# Altium PCB Sanity0.PcbDoc
Units mm, origin at the board's own origin, x right, y up, seen from the top; angles counter-clockwise.
Board outline 116.27 x 115.86 mm, 2 copper layers (Top Layer, Bottom Layer), stack 0.325 mm thick; 84 components, 58 nets, 336 pads, 100 vias.
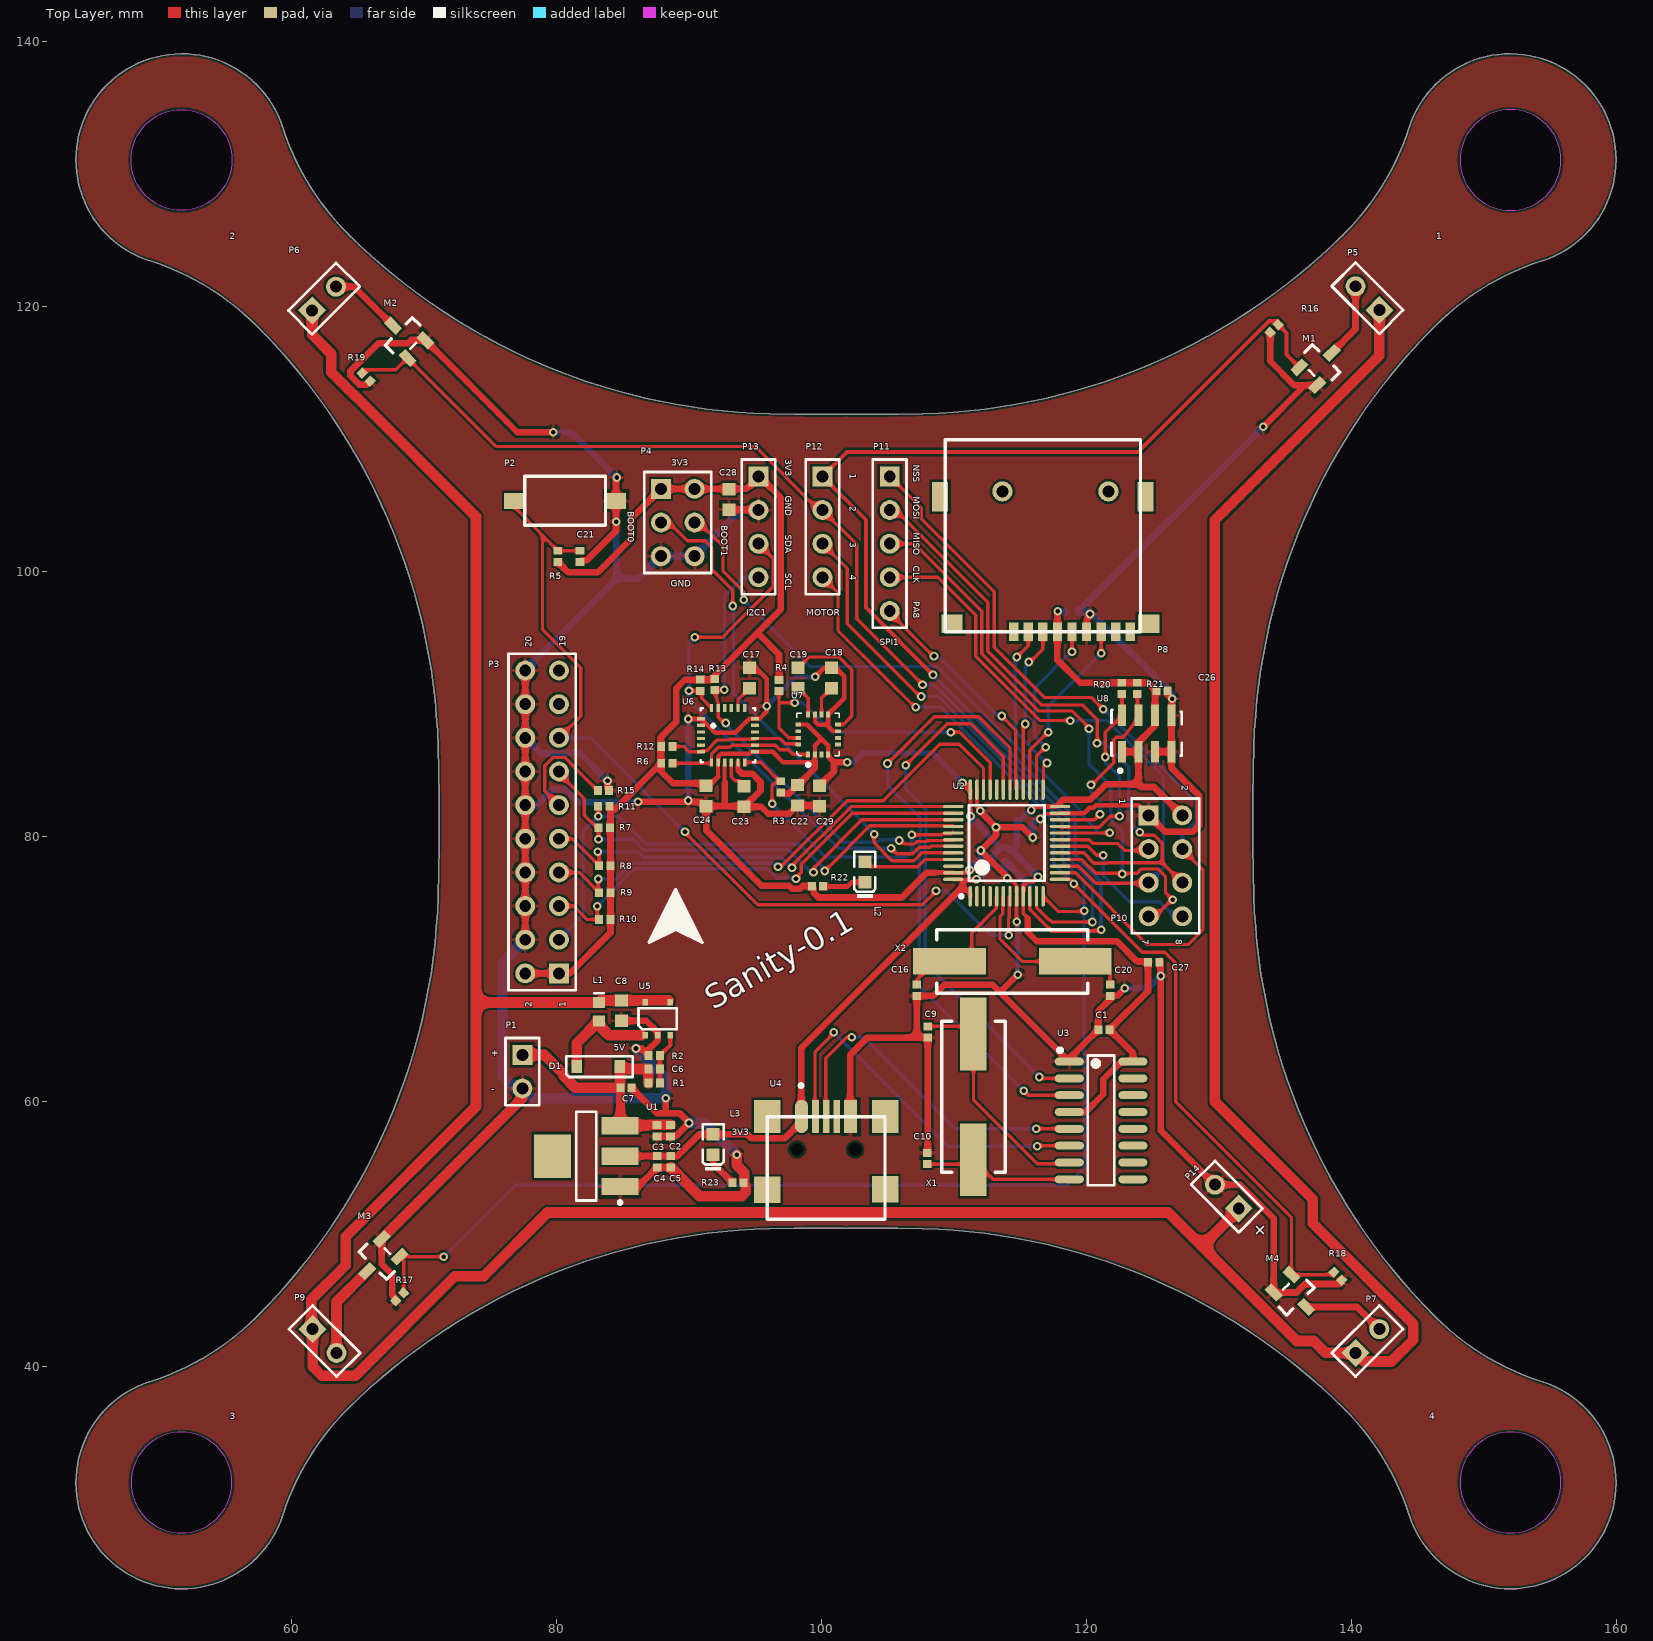
[diagram p0: Top Layer view]
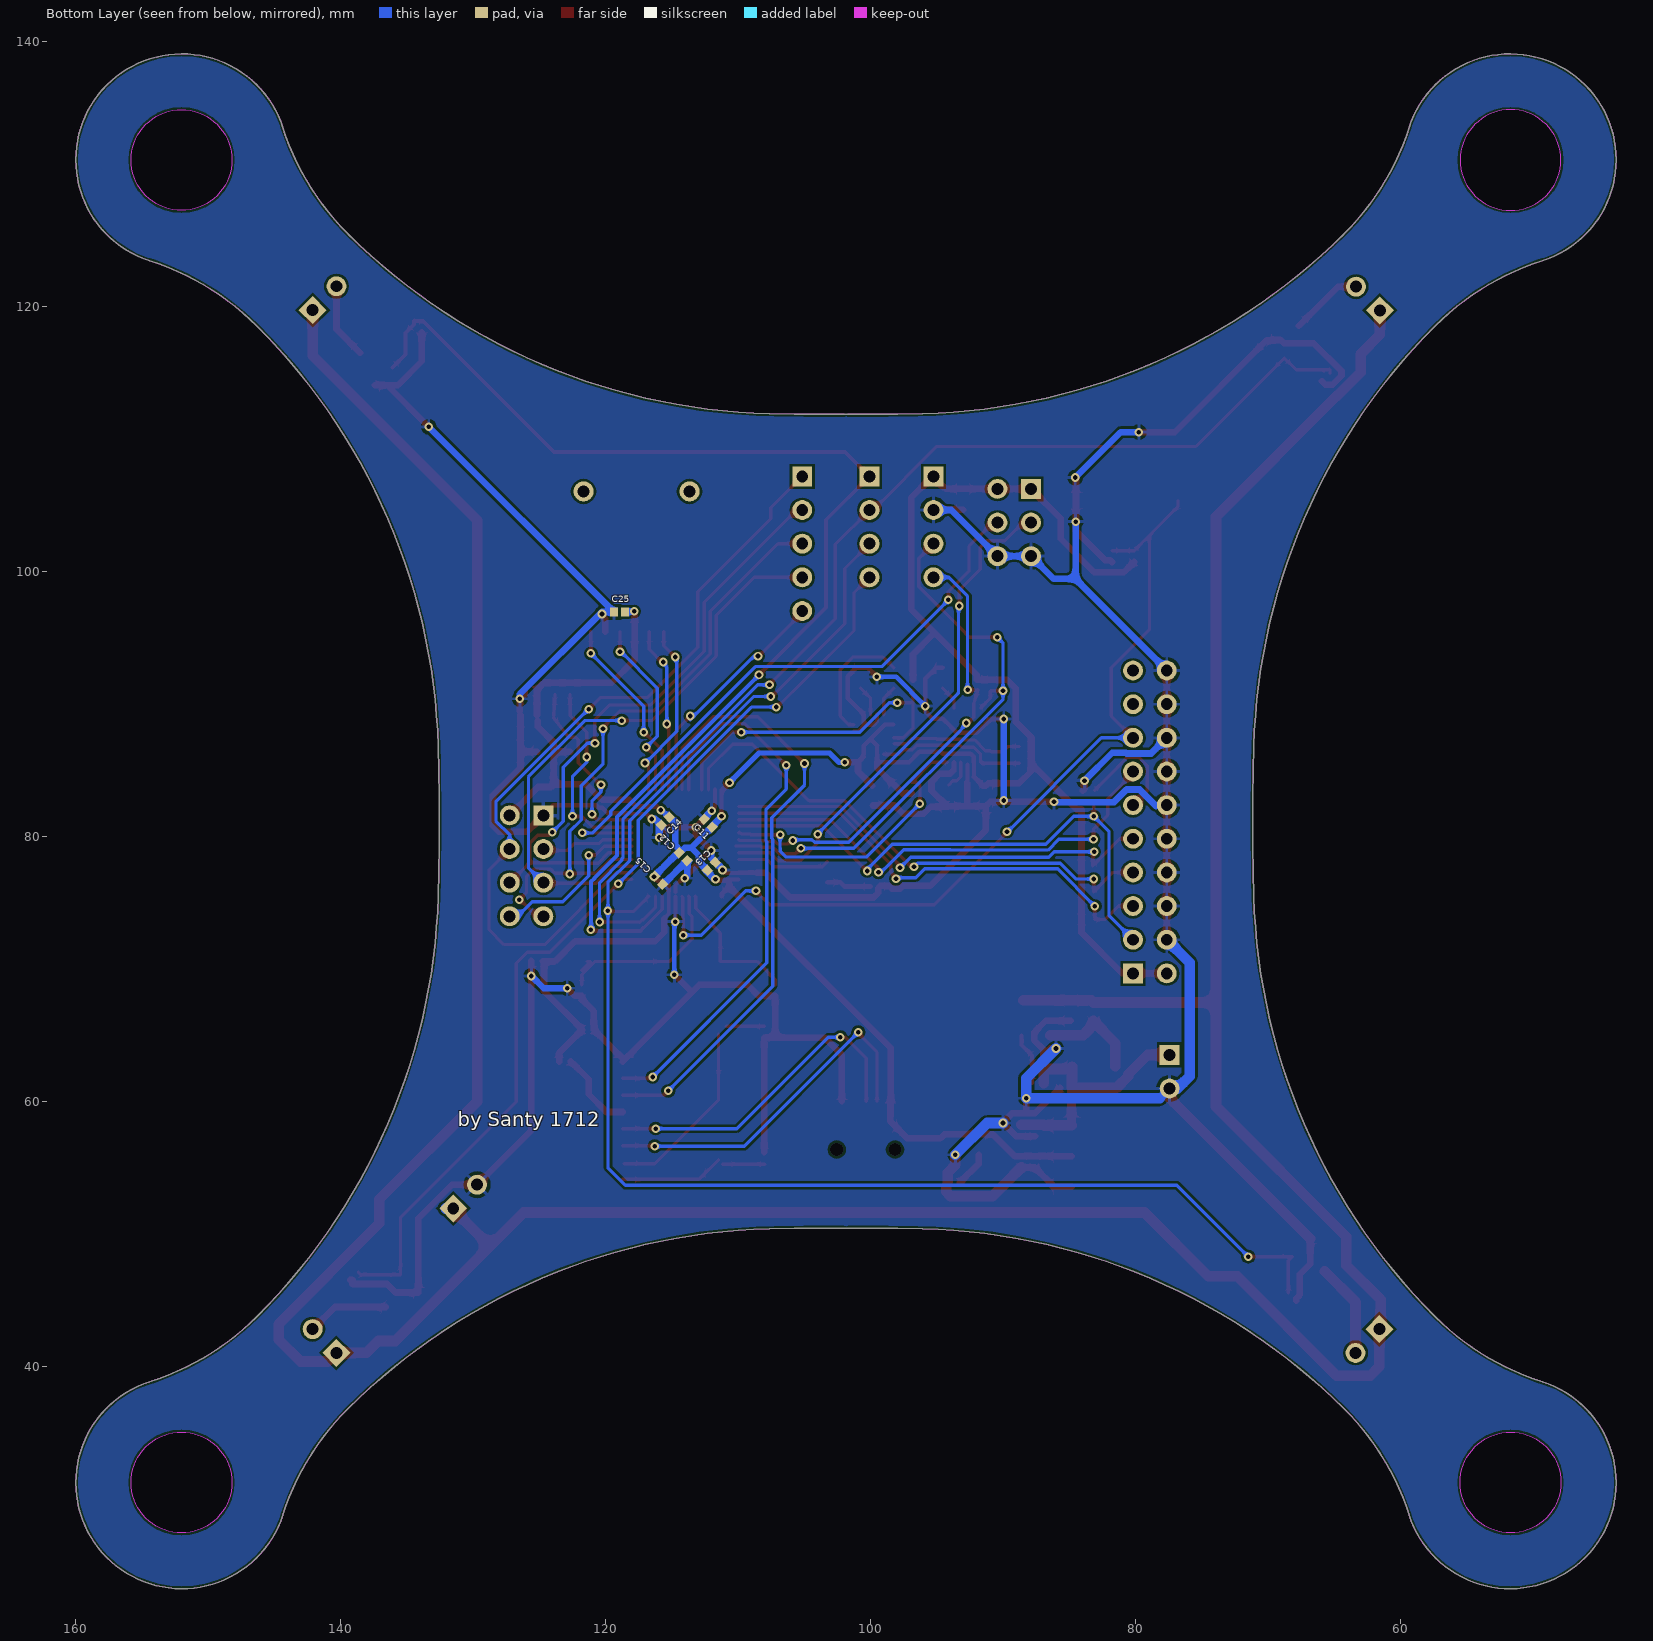
[diagram p1: Bottom Layer view, seen from below]

## Layer stack, top to bottom
Top Solder: solder mask 0.0102, Solder Resist, Dk 3.5
Top Layer: signal copper 0.0356
Dielectric 1: core 0.254, FR-4, Dk 4.2
Bottom Layer: signal copper 0.0356
Bottom Solder: solder mask 0.0102, Solder Resist, Dk 3.5

## Board outline
46.05,25.577 ccw(c51.719,31.223) 59.334,28.771 cw(c78.371,22.641) 64.279,36.833 cw(c97.207,3.671) 96.078,50.39 cw(c100.909,-149.552) 101.728,50.447 101.98,50.447 cw(c102.799,-149.552) 107.63,50.39 cw(c106.501,3.671) 139.429,36.833 cw(c125.337,22.641) 144.374,28.771 ccw(c151.989,31.223) 157.658,25.577 ccw(c151.989,31.223) 154.41,38.848 cw(c160.462,57.91) 146.327,43.76 cw(c179.355,76.823) 132.64,75.503 cw(c332.56,81.153) 132.56,81.153 cw(c332.56,81.153) 132.64,86.803 cw(c179.355,85.483) 146.327,118.546 cw(c160.462,104.396) 154.41,123.458 ccw(c151.989,131.083) 157.658,136.729 ccw(c151.989,131.083) 144.374,133.535 cw(c125.337,139.665) 139.429,125.473 cw(c106.501,158.635) 107.63,111.916 cw(c102.799,311.858) 101.98,111.859 101.728,111.859 cw(c100.909,311.858) 96.078,111.916 cw(c97.207,158.635) 64.279,125.473 cw(c78.371,139.665) 59.334,133.535 ccw(c51.719,131.083) 46.05,136.729 ccw(c51.719,131.083) 49.298,123.458 cw(c43.246,104.396) 57.381,118.546 cw(c24.353,85.483) 71.068,86.803 cw(c-128.852,81.153) 71.148,81.153 cw(c-128.852,81.153) 71.068,75.503 cw(c24.353,76.823) 57.381,43.76 cw(c43.246,57.91) 49.298,38.848 ccw(c51.719,31.223)
cut-out: 47.889,31.242 ccw(c51.689,31.242) 51.689,27.442 ccw(c51.689,31.242) 55.489,31.242 ccw(c51.689,31.242) 51.689,35.042 ccw(c51.689,31.242)
cut-out: 148.219,31.242 ccw(c152.019,31.242) 152.019,27.442 ccw(c152.019,31.242) 155.819,31.242 ccw(c152.019,31.242) 152.019,35.042 ccw(c152.019,31.242)
cut-out: 148.219,131.064 ccw(c152.019,131.064) 152.019,127.264 ccw(c152.019,131.064) 155.819,131.064 ccw(c152.019,131.064) 152.019,134.864 ccw(c152.019,131.064)
cut-out: 51.689,127.264 cw(c51.689,131.064) 47.889,131.064 cw(c51.689,131.064) 51.689,134.864 cw(c51.689,131.064) 55.489,131.064 cw(c51.689,131.064)

## Design rules (kind name [scope] priority, off if disabled: settings)
Clearance [All] p1: gap=0.18 except(0.16: Arc-Arc Arc-Track Arc-SMDPad Arc-THPad Arc-Via Track-Track Track-SMDPad Track-THPad Track-Via SMDPad-SMDPad SMDPad-THPad SMDPad-Via THPad-THPad THPad-Via Via-Via)
PolygonConnect [All] p1: connectstyle=Relief reliefconductorwidth=0.254 reliefentries=4 polygonreliefangle="90 Angle" airgapwidth=0.254
RoutingVias [All] p1: holewidth=0.711 width=1.27 viastyle="Through Hole" minholewidth=0.35 minwidth=0.65 maxholewidth=0.711 maxwidth=1.27
SolderMaskExpansion [All] p1: expansion=0.102
Width [InNet('3.7V-LIPO2S')] p1: maxlimit=1 minlimit=0.6 preferedwidth=0.8
30 further rules are at their usual default settings.

## Components (designator, comment, footprint, x,y, rotation, side; value= is the part's Value field where it differs from the comment)
C1 "0.1uF" LC-0402 122.1,65.825 r180 top
C2 "106" LC-0402 88.206,58.567 r270 top
C3 "104" LC-0402 87.19,58.567 r270 top
C4 "104" LC-0402 87.209,56.226 r270 top
C5 "106" LC-0402 88.225,56.226 r270 top
C6 "500pF" LC-0402 86.6,62.053 r0 top
C7 "10uF" LC-0402 84.475,60.625 r0 top
C8 "2.2uF" Cap-0603 84.851,66.843 r270 top
C9 "22pF" LC-0402 108.425,64.475 r90 top
C10 "22pF" LC-0402 107.575,56.475 r270 top
C11 "104" LC-0402 113.1,81.275 r225 bottom
C12 "104" LC-0402 114.975,78.75 r225 bottom
C13 "104" LC-0402 112.275,76.925 r135 bottom
C14 "104" LC-0402 115.23,81.991 r315 bottom
C15 "106" LC-0402 116.825,76.95 r225 bottom
C16 "22pF" LC-0402 106.788,69.173 r270 top
C17 "2.2nF" Cap-0603 94.518,91.948 r270 top
C18 "4.7uF" Cap-0603 100.792,91.986 r90 top
C19 "0.22uF" Cap-0603 98.203,91.948 r270 top
C20 "22pF" LC-0402 121.393,69.173 r270 top
C21 "104" LC-0402 81.375,101.925 r270 top
C22 "0.1uF" Cap-0603 98.15,83.1 r270 top
C23 "0.1uF" Cap-0603 94.125,83 r270 top
C24 "10nF" Cap-0603 91.25,83.05 r270 top
C25 "0.1uF" LC-0402 118.175,97.35 r0 bottom
C26 "0.1uF" LC-0402 124.925,90.6 r0 top
C27 "0.1uF" LC-0402 124.3,70.125 r0 top
C28 "0.1uF" Cap-0603 92.975,105.425 r270 top
C29 "22pF" Cap-0603 99.825,83.05 r270 top
D1 "D-Schottky MBR0520" SOD123 83.15,62.65 r0 top
L1 "Inductor" INDC1608L 83.2,66.775 r270 top
L2 "LED" 0603_LED_S1 103.275,77.325 r90 top
L3 "LED" 0603_LED_S1 91.825,56.75 r90 top
M1 "SI2302-NMOS" SOT-23(SOT-23-3) 137.636,115.628 r225 top
M2 "SI2302-NMOS" SOT-23(SOT-23-3) 68.55,117.675 r315 top
M3 "SI2302-NMOS" SOT-23(SOT-23-3) 66.6,48.075 r45 top
M4 "SI2302-NMOS" SOT-23(SOT-23-3) 135.7,45.375 r135 top
P1 "Test5V" HDR1X2 77.425,63.525 r270 top
P2 "ResetKey_C5382" ResetKeyC5382 80.646,105.344 r180 top
P3 "JTAG" HDR2X10 80.183,69.672 r90 top
P4 "STARTUP" HDR2X3 87.884,106.245 r270 top
P5 "MOTOR1" HDR1X2 142.113,119.743 r135 top
P6 "MOTOR2" HDR1X2 61.559,119.711 r45 top
P7 "MOTOR4" HDR1X2 140.317,41.021 r45 top
P8 "TFCard" TF_card 116.713,95.45 r180 top
P9 "MOTOR3" HDR1X2 61.595,42.817 r315 top
P10 "nRF24L01" HDR2X4 124.7,81.6 r270 top
P11 "Header 5" HDR1X5 105.156,107.188 r270 top
P12 "Header 4" HDR1X4 100.076,107.188 r270 top
P13 "Header 4" HDR1X4 95.25,107.188 r270 top
P14 "Li-po" HDR1X2 131.5,51.925 r135 top
R1 "40K" Res-0402 87.375,61.4 r180 top
R2 "13.3K" Res-0402 87.375,63.475 r0 top
R3 "4.7K" Res-0402 96.925,83.75 r270 top
R4 "2.2K" Res-0402 96.8,91.406 r90 top
R5 "10K" Res-0402 80.1,101.15 r270 top
R6 "2.2K" Res-0402 88.334,85.529 r180 top
R7 "10K" Res-0402 83.6,80.675 r0 top
R8 "10K" Res-0402 83.65,77.8 r0 top
R9 "10K" Res-0402 83.65,75.768 r0 top
R10 "10K" Res-0402 83.65,73.736 r0 top
R11 "10K" Res-0402 83.575,82.3 r0 top
R12 "4.7K" Res-0402 88.334,86.799 r180 top
R13 "4.7K" Res-0402 91.95,91.475 r90 top
R14 "4.7K" Res-0402 90.85,91.425 r90 top
R15 "4.7K" Res-0402 83.55,83.475 r180 top
R16 "10K" Res-0402 134.175,118.35 r45 top
R17 "10K" Res-0402 68.162,45.262 r45 top
R18 "10K" Res-0402 138.975,46.825 r315 top
R19 "10K" Res-0402 65.625,114.675 r315 top
R20 "10K" Res-0402 122.682,91.186 r90 top
R21 "10K" Res-0402 123.825,91.186 r90 top
R22 "10K" Res-0402 99.7,76.25 r0 top
R23 "10K" Res-0402 93.7,53.875 r180 top
U1 "AMS1117" AMS1117 82.25,55.875 r180 top
U2 "STM32F103C8T6" STM-LQFP48_L 113.983,79.516 r90 top
U3 "CH340G" LC-SOP-16_150mil 121.111,58.57 r270 top
U4 "miniUSB" miniUSB 99.475,54.725 r90 top
U5 "LM27313" LM27313 86.19,67.05 r0 top
U6 "MPU6050" MPU6050 92.95,87.648 r0 top
U7 "HMC5883L" LCCS50P300X300X90-16N-1 99.75,87.7 r90 top
U8 "MS5611" MS5611 122.301,90.043 r0 top
X1 "12MHz" LC-HC-49SMD 111.475,60.35 r90 top
X2 "8M" LC-HC-49SMD 114.408,70.57 r180 top

## Footprints (in the part's own frame and the unit in brackets; to place one, negate y for a bottom-side part, rotate by r counter-clockwise, add the part's x,y. Pads: shape width x height; smd on the part's side, far side on the other; paste and mask are expansions set on the pad)
0603_LED_S1 [mm]
  rect 0.93x0.98 smd: N(-0.77,0) P(0.77,0)
  silkscreen extent -1.98,-0.79 1.53,0.79, body extent -0.8,-0.4 0.8,0.4, height 0.6
AMS1117 [mm]
  rect 2.8x1.3 smd: 1(-2.55,2.3) 2(-2.55,0) 3(-2.55,-2.3)
  rect 2.8x3.3 smd: ""(2.55,0)
  Top Overlay keep-out lines w0.2: 0.75,3.35 0.75,-3.35 -0.75,-3.35 -0.75,3.35 0.75,3.35
  silkscreen extent -2.68,-3.35 0.75,3.62
Cap-0603 [mm]
  rect 0.93x0.98 smd: 1(-0.789,0.042) 2(0.751,0.042)
HDR1X2 [mm] "Connector; Header; 2 Position"
  rect 1.5x1.5 hole 0.9: 1(0,0)
  round 1.5 hole 0.9: 2(2.54,0)
  silkscreen extent -1.27,-1.27 3.81,1.27
HDR1X4 [mm] "Connector; Header; 4 Position"
  rect 1.5x1.5 hole 0.9: 1(0,0)
  round 1.5 hole 0.9: 2(2.54,0) 3(5.08,0) 4(7.62,0)
  silkscreen extent -1.27,-1.27 8.89,1.27
HDR1X5 [mm] "Connector; Header; 5 Position"
  rect 1.5x1.5 hole 0.9: 1(0,0)
  round 1.5 hole 0.9: 2(2.54,0) 3(5.08,0) 4(7.62,0) 5(10.16,0)
  silkscreen extent -1.27,-1.27 11.43,1.27
HDR2X3 [mm] "Connector; Header; 3x2 Position"
  rect 1.5x1.5 hole 0.9: 1(0,0)
  round 1.5 hole 0.9: 2(0,2.54) 3(2.54,0) 4(2.54,2.54) 5(5.08,0) 6(5.08,2.54)
  silkscreen extent -1.27,-1.27 6.35,3.81
HDR2X4 [mm] "Connector; Header; 4x2 Position"
  rect 1.5x1.5 hole 0.9: 1(0,0)
  round 1.5 hole 0.9: 2(0,2.54) 3(2.54,0) 4(2.54,2.54) 5(5.08,0) 6(5.08,2.54) 7(7.62,0) 8(7.62,2.54)
  silkscreen extent -1.27,-1.27 8.89,3.81
HDR2X10 [mm] "Connector; Header; 10x2 Position"
  rect 1.5x1.5 hole 0.9: 1(0,0)
  round 1.5 hole 0.9: 2(0,2.54) 3(2.54,0) 4(2.54,2.54) 5(5.08,0) 6(5.08,2.54) 7(7.62,0) 8(7.62,2.54) 9(10.16,0) 10(10.16,2.54) 11(12.7,0) 12(12.7,2.54) 13(15.24,0) 14(15.24,2.54) 15(17.78,0) 16(17.78,2.54) 17(20.32,0) 18(20.32,2.54) 19(22.86,0) 20(22.86,2.54)
  silkscreen extent -1.27,-1.27 24.13,3.81
INDC1608L [mm] "Chip Inductor, Body 1.6x0.8mm, IPC High Density"
  rect 0.8x0.9 smd: 1(-0.7,0) 2(0.7,0)
  silkscreen extent -1.4,-0.35 -1.4,0.35, body extent -0.87,-0.48 0.87,0.48, height 0.55
LC-0402 [mm]
  rect 0.6x0.65 smd mask+0.051: 0(1.2,0.4) 1(0.35,0.4)
LC-HC-49SMD [mm]
  rect 5.5x2 smd: 0(4.75,0) 1(-4.75,0)
  silkscreen extent -5.7,-2.4 5.7,2.4, body extent -6.7,-2.46 6.7,2.44, height 4
LC-SOP-16_150mil [mm]
  oval 0.6x2.2 smd: 1(-4.445,-2.4) 2(-3.175,-2.4) 3(-1.905,-2.4) 4(-0.635,-2.4) 5(0.635,-2.4) 6(1.905,-2.4) 7(3.175,-2.4) 8(4.445,-2.4) 9(4.445,2.4) 10(3.175,2.4) 11(1.905,2.4) 12(0.635,2.4) 13(-0.635,2.4) 14(-1.905,2.4) 15(-3.175,2.4) 16(-4.445,2.4)
  silkscreen extent -5.45,-3.25 4.9,1
LCCS50P300X300X90-16N-1 [mm] "LCC, 16-Pins, Body 3.00x3.00mmx0.90mm, Pitch 0.50mm, IPC Medium Density"
  rect 0.45x0.3 smd mask+0.05: 1(-1.5,0.75) 2(-1.5,0.25) 3(-1.5,-0.25) 4(-1.5,-0.75) 9(1.5,-0.75) 10(1.5,-0.25) 11(1.5,0.25) 12(1.5,0.75)
  rect 0.3x0.45 smd mask+0.05: 5(-0.75,-1.5) 6(-0.25,-1.5) 7(0.25,-1.5) 8(0.75,-1.5) 13(0.75,1.5) 14(0.25,1.5) 15(-0.25,1.5) 16(-0.75,1.5)
  silkscreen extent -2.4,-1.6 1.6,1.6, body extent -1.5,-1.5 1.5,1.5, height 0.9
LM27313 [mm]
  rect 0.4x0.5 smd: 1(0.5,-2.05) 2(1.45,-2.05) 3(2.4,-2.05) 4(2.4,0.45) 5(0.5,0.45)
  silkscreen extent 0,-1.6 2.9,0
miniUSB [mm]
  oval 2.5x1 smd: 1(4.149,0.975)
  rect 2.5x0.5 smd: 2(4.149,-0.075) 3(4.149,-0.875) 4(4.149,-1.675)
  rect 2.5x1 smd: 5(4.149,-2.725)
  rect 2x2 smd: 6(-1.397,3.556) 6(-1.351,-5.325)
  rect 2.5x2 smd: 6(4.149,-5.325) 6(4.149,3.575)
  round 0 hole 1: ""(1.649,1.325) ""(1.649,-3.075)
  Top Overlay keep-out lines w0.254: -3.601,-4.275 -3.601,-5.325 -1.351,-5.325 4.124,-5.325 4.124,3.575 -3.601,3.575 -3.601,-4.553
  silkscreen extent -3.6,-5.33 6.6,3.57
MPU6050 [mm]
  rect 0.6x0.25 smd: 1(-2.05,1.25) 2(-2.05,0.75) 3(-2.05,0.25) 4(-2.05,-0.25) 5(-2.05,-0.75) 13(2.05,-1.25) 14(2.05,-0.75) 15(2.05,-0.25) 16(2.05,0.25) 17(2.05,0.75) 18(2.05,1.25)
  rect 0.6x0.25 smd mask+0.102: 6(-2.05,-1.25)
  rect 0.25x0.6 smd: 7(-1.25,-2.05) 8(-0.75,-2.05) 9(-0.25,-2.05) 10(0.25,-2.05) 11(0.75,-2.05) 12(1.25,-2.05) 19(1.25,2.05) 20(0.75,2.05) 21(0.25,2.05) 22(-0.25,2.05) 23(-0.75,2.05) 24(-1.25,2.05)
  silkscreen extent -2.05,-2.05 2.05,2.05
MS5611 [mm]
  rect 0.6x1.6 smd: 1(0.375,-3.647) 2(1.625,-3.647) 3(2.875,-3.647) 4(4.125,-3.647) 5(4.125,-0.893) 6(2.875,-0.893) 7(1.625,-0.893) 8(0.375,-0.893)
  silkscreen extent -0.4,-5.21 4.9,-0.49
Res-0402 [mm]
  rect 0.6x0.65 smd mask+0.051: 0(0.425,0) 1(-0.425,0)
ResetKeyC5382 [mm]
  rect 1.5x1.2 smd: 0(-3.85,0) 1(3.85,0)
  silkscreen extent -3.05,-1.85 3.05,1.85
SOD123 [mm]
  rect 0.8x1 smd: N(1.62,0) P(-1.62,0)
  silkscreen extent -2.4,-0.8 2.6,0.76
SOT-23(SOT-23-3) [mm]
  rect 1.25x0.7 smd: D(-1.25,0) G(1.25,-0.95) S(1.25,0.95)
  silkscreen extent -0.65,-1.46 0.9,1.46
STM-LQFP48_L [mm] "QFP, 48-Leads, Body 7x7mm, Pitch 0.5mm, IPC High Density"
  oval 1.55x0.25 smd: 1(-4.025,2.75) 2(-4.025,2.25) 3(-4.025,1.75) 4(-4.025,1.25) 5(-4.025,0.75) 6(-4.025,0.25) 7(-4.025,-0.25) 8(-4.025,-0.75) 9(-4.025,-1.25) 10(-4.025,-1.75) 11(-4.025,-2.25) 12(-4.025,-2.75) 25(4.025,-2.75) 26(4.025,-2.25) 27(4.025,-1.75) 28(4.025,-1.25) 29(4.025,-0.75) 30(4.025,-0.25) 31(4.025,0.25) 32(4.025,0.75) 33(4.025,1.25) 34(4.025,1.75) 35(4.025,2.25) 36(4.025,2.75)
  oval 0.25x1.55 smd: 13(-2.75,-4.025) 14(-2.25,-4.025) 15(-1.75,-4.025) 16(-1.25,-4.025) 17(-0.75,-4.025) 18(-0.25,-4.025) 19(0.25,-4.025) 20(0.75,-4.025) 21(1.25,-4.025) 22(1.75,-4.025) 23(2.25,-4.025) 24(2.75,-4.025) 37(2.75,4.025) 38(2.25,4.025) 39(1.75,4.025) 40(1.25,4.025) 41(0.75,4.025) 42(0.25,4.025) 43(-0.25,4.025) 44(-0.75,4.025) 45(-1.25,4.025) 46(-1.75,4.025) 47(-2.25,4.025) 48(-2.75,4.025)
  silkscreen extent -4.15,-2.85 2.85,3.55, body extent -3.5,-3.5 3.5,3.5, height 1.6
TF_card [mm]
  rect 0.7x1.4 smd: 1(2.2,0) 2(1.1,0) 3(0,0) 4(-1.1,0) 5(-2.2,0) 6(-3.3,0) 7(-4.4,0) 8(-5.5,0) ""(-6.6,0)
  rect 1.6x1.4 smd: ""(-8,-0.6) ""(6.85,-0.6)
  rect 1.2x2.2 smd: ""(-7.75,-10.2) ""(7.75,-10.2)
  round 1.524 hole 0.9: ""(-4.95,-10.6) ""(3.05,-10.6)
  silkscreen extent -7.37,-14.5 7.37,0

## Part data
C1 C2 C3 C4 C5 C6 C7 C9 C10 C11 C12 C13 C14 C15 C16 C20 C21 C25 C26 C27: library part Cap-0402
C8 C17 C18 C19 C22 C23 C24 C28 C29: library part Cap0603
P1 P5 P6 P7 P9 P14: library part "Header 2", "Header, 2-Pin"
P3: library part "Header 10X2", "Header, 10-Pin, Dual row"
P4: library part "Header 3X2", "Header, 3-Pin, Dual row"
P10: library part "Header 4X2", "Header, 4-Pin, Dual row"
P11: "Header, 5-Pin"
P12 P13: "Header, 4-Pin"
R1 R2 R3 R4 R5 R6 R7 R8 R9 R10 R11 R12 R13 R14 R15 R16 R17 R18 R19 R20 R21 R22 R23: library part Res-0402
U2: "ARM Cortex-M3 32-bit MCU, 64 KB Flash, 20 KB Internal RAM, 37 I/Os, 48-pin LQFP, -40 to 85 degC, Tray"
X1 X2: library part 49SMD

## Via types
v1: diameter 0.65, hole 0.35, Top Layer to Bottom Layer, tented both sides, 100 vias

## Nets (pads, with @x,y where several pads share a name; then routed paths per layer and width w, separated by ;. In a path a pad name is that pad's centre, name@x,y a point inside that pad or via, vN(x,y) a via of type N, cw(c..) or ccw(c..) an arc to the next point about the centre after c; other vN are vias at no path point)
3.7V-LIPO2S: C8.1 L1.1 P5.1 P6.1 P7.1 P9.1 P14.1 U5.4 U5.5 | length 291.8
  Top Layer w0.8: P9.1@61.5,42.912 61.5,45.05 64.1,47.65 64.1,49.8 73.925,59.625 73.925,104.15 64.801,113.274 64.785,113.274 63,115.058 63,116.425 61.559,117.866 P6.1 ; P9.1 61.595,39.995 62.29,39.3 64.825,39.3 72.325,46.8 74.5,46.8 79.325,51.625 126.175,51.625 135.875,41.925 137.175,41.925 138.079,41.021 P7.1 140.963,40.375 143.025,40.375 144.675,42.025 144.675,42.125 144.687,42.138 144.687,43.187 137.075,50.8 137.075,52.625 129.7,60 129.7,103.875 142.113,116.288 P5.1 ; 73.925,67.475 L1.1 83.357,67.632 C8.1 U5.4@88.458,67.632 ; 128.725,49.075 131.1,51.45 P14.1@131.1,51.925
  Bottom Layer w0.8: P14.1 P14.1@132.075,51.925
3V3: C1.1 C4.1 C5.1 C11.0 C12.1 C13.1 C14.1 C15.1 C22.1 C24.1 C25.1 C26.1 C27.1 C28.1 C29.1 L3.P P3.1 P3.2 P4.1 P4.2 P8.4 P10.2 P13.1 R3.0 R4.0 R5.0 R6.0 R7.0 R8.0 R9.0 R10.0 R11.0 R12.0 R13.0 R14.0 R20.0 R21.0 U1.2 U2.1 U2.9 U2.24 U2.36 U2.48 U3.4 U3.16 U4.1 U6.8 U6.13 U7.2 U7.4 U7.13 U8.1 U8.2 U8.6 | length 236.3
  Top Layer w0.3: 92.2,84.5 U6.8 ; U7.13 98.925,88.45 ; 99.5,85.65 U7.2 99.5,86.85 ; U2.48 U2.48@110.608,76.766 ; U2.36@111.206,83.568 U2.36 111.253,83.521 111.253,83.342 111.255,83.34 v1(111.255,81.529) ; U2.9@115.233,75.858 U2.9 115.233,74.206 115.575,73.864 115.575,73.8
  Top Layer w0.35: C24.1@91.539,83.839 92.2,84.5 ; U6.8 92.215,85.613 92.215,85.624 92.22,85.629 92.22,86.045 92.425,86.25 92.425,86.253 94.553,86.253 94.698,86.398 U6.13 96.32,86.398 97.098,85.62 99.297,85.62 99.327,85.65 ; 98.925,88.45 100.505,86.87 U7.4@100.505,86.2 ; 99.5,86.85 99.95,87.3 ; 110.678,76.228 111.233,75.673 U2.1 ; U2.9@115.253,75.878 115.253,76.34 115.534,76.621 115.932,76.621 115.964,76.589 v1(116.35,76.975) ; v1@115.775,82 v1(115.85,82) 116.116,82.266 117.7,82.266 118.209,82.775
  Top Layer w0.4: U7.4@100.55,86 100.949,85.599 ; v1(110.645,84.074) U2.36@111.178,83.541 ; 110.678,76.228 110.678,76.696 v1@111.623,76.696
  Top Layer w0.5: P3.2 P3.1 80.997,69.672 84.075,72.75 R10.0 R9.0 84.075,81.9 ; R5.0 80.875,99.95 83.125,99.95 85.65,102.475 85.65,104.011 P4.1 P4.2 94.307,106.245 95.45,107.063 96.925,105.588 96.925,97.15 91.978,92.203 91.978,91.831 89.681,91.831 89.05,91.2 89.05,88.675 87.886,87.511 R6.0@87.886,85.529 ; R11.0@84.075,82.047 84.428,82.047 85.97,83.589 85.97,83.613 R6.0@87.886,85.529 ; U1.2 C5.1@88.624,55.875 ; 87.84,87.465 R6.0@87.886,85.529 ; R6.0 87.909,84.894 88.783,84.02 91.111,84.02 C24.1 C24.1@91.539,83.839 ; C5.1 89.126,55.876 90.77,57.52 L3.P 94.424,57.52 94.73,57.214 97.214,57.214 98.525,58.525 U4.1@98.525,60.024 ; 95.35,95.2 96.8,93.75 R4.0 ; R3.0@96.9,83.255 97.558,83.255 C22.1 ; C22.1@98.298,83.95 99.5,85.152 99.5,85.65 ; U4.1@98.466,58.874 98.466,64.016 110.678,76.228 ; C29.1 100.949,84.921 100.949,85.599 v1(101.96,85.597) ; v1@111.623,76.696 v1(111.705,76.779) ; 115.575,73.8 115.575,72.775 116.25,72.1 122.3,72.1 123.825,70.575 C27.1@124.725,70.575 ; v1(117.85,97) 117.813,96.963 P8.4 117.813,93.337 119.539,91.611 R20.0 R21.0 124.639,91.611 125.176,91.074 U8.6 ; 118.209,82.775 120.263,82.775 120.633,83.145 120.663,83.145 121.468,83.95 123.926,83.95 ; U3.4 119.93,59.205 121.275,60.55 121.275,61.675 U3.16@122.625,63.025 ; U8.1 U8.2 ; U3.16 123.511,63.664 C1.1 124.65,68.325 C27.1 ; U8.6@125.125,88.724 125.125,88.305 123.926,87.106 U8.2 ; P10.2 125.1,83.74 124.136,83.74 123.926,83.95 ; 123.926,83.95 U8.2
  Bottom Layer w0.254: C11.0@112.02,80.671 C11.0@112.02,80.717
  Bottom Layer w0.35: 114.95,81.175 v1@115.775,82
  Bottom Layer w0.4: v1(101.96,85.597) 102.386,85.597 103.09,86.3 108.419,86.3 v1(110.645,84.074)
  Bottom Layer w0.5: P4.1@87.845,106.245 P4.1 ; v1(111.255,81.529) 111.255,81.495 C11.0@112,80.75 ; v1(111.705,76.779) 111.804,76.779 C13.1@112.475,77.45 ; C11.0@112.02,80.671 113.535,79.156 ; C13.1 112.972,78.117 112.972,78.593 113.535,79.156 ; C12.1@114.275,78.885 114.004,79.156 113.535,79.156 ; 114.95,81.175 114.75,81.175 114.75,79.36 114.36,78.97 115.62,77.71 ; 115.6,77.725 v1(116.35,76.975) ; v1(117.85,97) 118.425,97 C25.1@118.475,96.95
5V: C2.1 C3.1 C6.1 C7.1 D1.N P1.1 R1.0 U1.3 | length 20
  Top Layer w0.7: U1.3@84.825,58.2 C7.1
  Top Layer w0.8: P1.1 79.075,63.525 80.55,62.05 80.55,61.91 81.435,61.025 84.795,61.025 84.795,62.625 84.967,62.453 86.92,62.453 R1.0@86.92,61.4 ; U1.3@84.825,58.2 86.978,58.2 86.978,58.247 C2.1@88.606,58.247
BARO_SCL: R20.1 U2.21 U8.8 | length 15
  Top Layer w0.25: U2.21 118.068,80.706 120.981,80.706 121.8,81.525 v1(122.5,81.525) ; v1(121.431,86.004) 121.431,87.881 U8.8@122.676,89.126 ; U8.8 R20.1
  Bottom Layer w0.25: v1(121.431,86.004) 121.431,85.594 122.5,84.525 v1(122.5,81.525)
BARO_SDA: R21.1 U2.22 U8.7 | length 14.1
  Top Layer w0.25: U2.22 120.618,81.266 v1(121.031,81.679) ; v1(120.35,83.9) 120.415,83.9 122.071,85.555 122.071,87.322 122.249,87.501 122.739,87.501 123.049,87.811 U8.7@123.925,88.975 ; R21.1 U8.7
  Bottom Layer w0.25: v1(120.35,83.9) 120.35,83.35 121.031,82.669 v1(121.031,81.679)
BOOT0: P4.3 U2.44 | length 38.8
  Top Layer w0.25: P4.3 88.495,103.705 89.875,102.325 91.225,102.325 91.725,101.825 91.725,100.175 93.3,98.6 v1(93.3,97.4) ; v1(103.975,80.175) 103.975,79.521 105.321,78.175 106.975,78.175 107.068,78.268 107.431,78.631 107.444,78.631 107.579,78.766 108.402,78.766 U2.44
  Bottom Layer w0.25: v1(93.3,97.4) 93.355,97.345 93.355,90.87 93.375,90.85 93.375,90.825 103.975,80.225 v1(103.975,80.175)
BOOT1: P4.4 U2.20 | length 46.8
  Top Layer w0.25: P4.4 90.77,103.705 92.575,101.9 92.575,100.025 94.125,98.475 v1(94.125,97.875) ; U2.20 118.017,80.275 v1(121.75,80.275)
  Bottom Layer w0.25: P4.4@90.424,103.951 P4.4@90.675,103.7 ; v1@94.1,97.875 99.145,92.83 108.686,92.83 119.6,81.916 119.6,81.65 120.975,80.275 v1(121.75,80.275)
CPU_RX: U2.31 U3.2 | length 42.1
  Top Layer w0.254: v1(106.362,85.388) 109.482,88.507 111.268,88.507 113.733,86.042 U2.31 ; v1@116.555,61.745 U3.2
  Bottom Layer w0.254: v1(106.362,85.388) 106.362,83.588 107.891,82.059 107.891,79.683 107.825,79.617 107.825,70.475 v1(116.45,61.85)
CPU_TX: U2.30 U3.3 | length 47.5
  Top Layer w0.25: 111.875,89.05 114.233,86.692 U2.30
  Top Layer w0.254: v1(104.988,85.513) 108.525,89.05 111.875,89.05 ; v1(115.275,60.8) 115.6,60.475 U3.3
  Bottom Layer w0.254: v1(104.988,85.513) 104.988,83.888 107.457,81.418 107.457,79.863 107.375,79.781 107.375,68.7 v1(115.275,60.8)
D+: U3.5 U4.3 | length 25.2
  Top Layer w0.254: U4.3@100.316,60.024 100.316,63.266 101.9,64.85 v1(102.275,64.85) ; v1(116.225,57.95) 118.696,57.95 U3.5
  Bottom Layer w0.254: v1(102.275,64.85) 103.2,64.85 110.1,57.95 v1(116.225,57.95)
D-: U3.6 U4.2 | length 27.1
  Top Layer w0.254: U4.2@99.516,60.024 99.516,63.741 100.925,65.15 v1(100.925,65.225) ; v1@116.34,56.665 U3.6
  Bottom Layer w0.254: v1(100.925,65.225) 109.525,56.625 v1(116.3,56.625)
EXT1: P11.5 U2.29 | length 18.3
  Top Layer w0.25: P11.5 105.022,97.028 v1@108.5,93.55 ; v1(113.6,89.1) 114.663,88.037 U2.29@114.663,83.611
  Bottom Layer w0.25: v1(108.5,93.625) 108.8,93.625 113.6,88.825 v1(113.6,89.1)
FB: C6.0 R1.1 R2.0 U5.3 | length 3.9
  Top Layer w0.3: R1.1 C6.0 R2.0 88.59,64.265 U5.3
GND: C1.0 C2.0 C3.0 C4.0 C5.0 C7.0 C8.2 C9.1 C10.1 C11.1 C12.0 C13.0 C14.0 C15.0 C16.0 C17.1 C18.2 C20.0 C21.0 C22.2 C23.2 C24.2 C25.0 C26.0 C27.0 C28.2 C29.2 M1.S M2.S M3.S M4.S P1.2 P2.0 P3.4 P3.6 P3.8 P3.10 P3.12 P3.14 P3.16 P3.18 P3.20 P4.5 P4.6 P8.6 P10.1 P13.2 P14.2 R2.1 R15.1 R16.1 R17.1 R18.0 R19.0 R22.1 R23.1 U1.1 U2.8 U2.23 U2.35 U2.47 U3.1 U4.5 U5.2 U6.1 U6.2 U6.9 U6.11 U6.18 U7.7 U7.9 U7.11 U8.3 U8.4 U8.5 | length 442.8
  Top Layer w0.3: U6.9@92.7,85.423 92.7,84.225 92.8,84.125 ; 99.5,88.7 U7.11 ; 100.873,87.95 U7.7 ; U2.47 v1@110.966,77.266 ; U2.35 111.735,83.539 111.735,82.215 v1(112,81.95) v1@112,81.875 ; v1@114.1,76.95 114.725,76.325 U2.8@114.725,75.8 ; 114.733,73.992 U2.8 ; v1(116.525,81.325) 116.528,81.325 116.924,81.721 U2.23@117.82,81.721
  Top Layer w0.35: v1(89.95,88.875) 90.923,88.875 91.973,87.825 93.483,87.825 93.96,88.302 93.96,88.31 94.548,88.898 U6.18 95.323,88.898 95.875,89.45 v1(95.875,89.85) 95.875,91.9 95.038,92.737 C17.1 ; 93.7,85.048 U6.11 ; v1(99.525,92.05) 100.212,92.737 C18.2 101.088,92.737 101.725,92.1 101.725,90.45 100.505,89.23 100.505,88.318 100.873,87.95 ; 99.597,88.603 99.75,88.45 100.275,88.45 100.425,88.6 ; 108.6,77.275 U2.47@109.958,77.275 ; v1@110.966,77.266 v1(111.175,77.475) v1@111.175,77.575 ; v1(114.75,73.575) 114.75,73.975 ; U2.23 119.841,81.766 120.245,82.17 120.513,82.17 120.702,82.359 123.941,82.359 P10.1 ; U3.1 U3.1@118.711,63.236 ; C20.0@121.793,67.718 C20.0
  Top Layer w0.5: R19.0 65.655,114.104 65.129,114.104 64.453,114.78 64.453,115.138 66.553,117.239 68.79,117.239 69.014,117.463 M2.S 77.044,110.525 v1(79.75,110.525) ; M3.S 66.812,47.738 67.591,46.959 67.591,45.402 67.861,45.131 R17.1 ; P1.2@77.425,60.244 P1.2 ; P3.4 P3.6 P3.8 P3.10 P3.12 P3.14 P3.16 P3.18 P3.20 ; C21.0 81.895,100.845 82.278,100.845 84.496,103.063 P2.0 v1@84.496,107.046 ; v1(83.855,84.225) 83.855,83.595 R15.1 ; U1.1 86.158,53.575 C4.0 C5.0 ; C8.2 86.772,66.092 87.64,65.224 U5.2 87.64,64.615 86.95,63.925 R2.1 86.425,64 v1(86,64) ; C7.0 87.6,59.1 89.325,59.1 v1@90,58.425 ; v1(86.15,82.625) 90.966,82.625 C24.2 ; C3.0 C2.0 88.989,57.367 v1(90,58.378) ; 88.25,59.225 v1(88.25,60.25) ; 92.7,82.374 92.7,84.025 ; C28.2 95.224,104.674 P13.2 ; 93.762,84.987 93.998,84.75 94.775,84.75 95.4,84.125 95.4,83.459 94.24,82.299 C24.2 ; C23.2 95.458,82.249 95.987,81.72 97.563,81.72 C22.2 C29.2@99.817,82.349 ; R22.1 99.415,76.11 99.415,75.75 99.42,75.75 99.77,75.4 106.075,75.4 107.95,77.275 108.6,77.275 ; R22.1@99.275,76.275 98.59,76.275 98.384,76.069 97.775,76.069 97.569,76.275 95.5,76.275 91.292,80.483 C24.2 ; U4.5@102.166,60.024 102.166,63.516 103.475,64.825 107.2,64.825 ; C16.0 108.448,67.973 109.275,68.8 112.926,68.8 U3.1 ; C16.0@107.2,67.961 107.2,64.825 ; C10.1@108.025,56.175 C9.1 107.2,64.825 ; v1@112,81.875 v1(113.175,80.7) ; 113.488,68.242 v1(114.811,69.564) ; v1@114.025,76.95 v1(112.025,78.95) 113.175,80.1 v1(113.175,80.7) ; v1(115.95,79.925) 115.175,80.7 v1(113.175,80.7) ; U3.1@118.711,63.236 C1.0 120.9,66.825 C20.0@121.793,67.718 ; P8.6 120.013,96.388 120.275,96.65 v1(120.275,96.8) ; C20.0 122.323,67.973 v1(122.9,68.55) ; P10.1 125.95,80.35 128.025,80.35 128.5,80.825 128.5,83.109 126.426,85.183 U8.4 ; U8.3 U8.4 ; C27.0@125.6,70.625 v1(125.6,69.475) 125.6,57.825 P14.2 131.604,53.721 134.144,51.181 M4.S 135.862,45.587 136.5,46.225 139.106,46.225 139.106,46.524 R18.0 ; C26.0 126.125,90.75 v1(126.475,90.4) U8.5@126.475,89.451 ; U8.5 U8.4 ; v1(133.35,110.925) 136.45,114.025 ; R16.1 133.874,115.876 135.678,114.072 M1.S
  Top Layer w0.8: M3.S P1.2@77.425,60.244 ; C5.0@88.625,55.016 90.791,52.85 93.975,52.85 94.3,53.175 R23.1@94.3,53.6 ; v1(93.595,55.98) 93.595,55.205 94.175,54.625 R23.1@94.175,53.975
  Bottom Layer w0.25: C11.1@112.608,81.272 C11.1@112.621,81.272
  Bottom Layer w0.3: v1@116.261,81.325 v1(116.525,81.325)
  Bottom Layer w0.35: v1(95.875,89.85) 98.075,92.05 v1(99.525,92.05) ; v1(111.175,77.475) v1@111.175,77.522 ; v1(114.75,73.575) 114.811,73.514 v1(114.811,69.564)
  Bottom Layer w0.5: P1.2@76.84,60.985 P1.2 78.16,60.25 ; P3.12 78.45,82.372 78.45,82.308 79.694,83.552 80.672,83.552 81.624,82.6 v1@85.875,82.6 ; P3.16 78.823,86.272 80.672,86.272 80.725,86.325 81.755,86.325 v1(83.855,84.225) ; P3.20@77.688,92.612 84.525,99.45 ; v1(79.75,110.525) 81.125,110.525 v1(84.55,107.1) ; v1(84.525,103.775) 84.525,99.45 ; v1(89.95,82.725) v1(89.95,88.875) ; P13.2 93.907,104.648 P4.6 P4.5 86.169,99.45 84.525,99.45 ; v1@111.175,77.522 C13.0 112.025,78.372 v1(112.025,78.95) ; v1(112,81.95) C11.1@112.57,81.38 ; v1(114.025,76.85) 113.844,77.031 C12.0 C15.0@115.626,76.401 ; C14.0 v1@116.261,81.325 ; v1(115.95,79.925) C14.0@115.95,80.705 ; v1@120.275,96.95 C25.0 v1(133.35,110.925) ; v1@120.35,96.875 126.475,90.75 v1(126.475,90.4) ; v1(122.9,68.55) 124.675,68.55 v1(125.6,69.475)
  Bottom Layer w0.8: P1.2@76.84,60.985 75.906,61.919 75.906,70.475 P3.4 ; 78.16,60.25 v1(88.25,60.25) 88.25,61.75 v1(86,64) ; v1(90,58.378) 91.197,58.378 v1(93.595,55.98)
HMC_INT: R4.1 U2.33 U7.15 | length 24.3
  Top Layer w0.254: R4.1 96.8,88.175 97.525,87.45 U7.15 ; 96.925,90.1 v1(97.975,90.1) ; v1(109.75,87.875) 110.375,87.875 110.4,87.9 112.733,85.567 U2.33
  Bottom Layer w0.254: v1(97.975,90.1) 98.6,90.1 100.825,87.875 v1(109.75,87.875)
HMC_SCL: R6.1 U6.7 U6.14 U7.1 | length 11.4
  Top Layer w0.254: R6.1 U6.7@91.63,85.529 ; U6.7 91.7,86.21 92.225,86.735 93.087,86.735 93.25,86.898 U6.14 96.502,86.898 96.837,86.563 97.487,86.563 97.85,86.2 U7.1
HMC_SDA: R12.1 U6.6 U6.15 U7.16 | length 10.2
  Top Layer w0.25: R12.1 89.601,86.799 90.002,86.398 U6.6 90.97,86.468 91.326,86.468 92.152,87.294 93.035,87.294 93.083,87.342 U6.15@95,87.342 ; U6.15 96.877,87.398 97.28,86.995 U7.16@98.205,86.995
JNRST: P3.3 R11.1 U2.40 | length 41.3
  Top Layer w0.254: v1(83.15,81.525) R11.1 ; v1@100.2,77.625 100.475,77.625 103.657,80.807 109.917,80.807 U2.40
  Bottom Layer w0.254: P3.3 82,74.029 82,80.375 v1(83.15,81.525) 84.675,81.525 86.75,79.45 ; 86.775,79.425 86.782,79.418 93.787,79.418 93.794,79.425 98.375,79.425 100.25,77.55 v1(100.25,77.4)
JTCK: P3.9 R8.1 U2.37 | length 34.3
  Top Layer w0.254: P3.9 81.193,79.832 R8.1 83.225,78.75 v1(83.125,78.85) ; v1@97.688,77.713 102.241,82.266 U2.37
  Bottom Layer w0.254: v1(83.125,78.85) 86.122,78.85 86.54,78.432 87.243,78.432 87.25,78.425 ; 87.261,78.45 96.975,78.45 v1(97.775,77.65)
JTDI: P3.5 R10.1 U2.38 | length 35
  Top Layer w0.254: P3.5 81.298,74.752 82.314,73.736 R10.1@83.075,73.736 ; R10.1@83.075,73.886 v1(83.075,74.75) ; v1@97.988,76.813 98.464,77.289 98.464,77.904 102.326,81.766 U2.38
  Bottom Layer w0.254: v1(83.075,74.75) 85.882,77.557 95.918,77.557 96.575,76.9 v1@98.075,76.9
  other v1: 98.08,76.804
JTDO: P3.13 R7.1 U2.39 | length 36.5
  Top Layer w0.254: P3.13@80.281,84.912 P3.13 80.183,84.773 82.1,82.856 82.1,81.625 83.175,80.55 v1(83.175,79.8) ; v1@99.375,77.25 99.375,77.586 103.055,81.266 U2.39
  Bottom Layer w0.254: v1(83.175,79.8) 85.786,79.8 86.602,78.984 93.967,78.984 93.974,78.991 97.509,78.991 99.405,77.095 v1(99.405,77.304)
JTMS: P3.7 R9.1 U2.34 | length 40.3
  Top Layer w0.25: v1@96.825,77.75 96.984,77.75 101.932,82.698 104.648,82.698 108.925,86.975 110.4,86.975 112.233,85.142
  Top Layer w0.254: P3.7 81.701,77.292 83.15,75.843 v1(83.15,76.8) ; U2.34 112.233,85.142
  Bottom Layer w0.25: 87.375,77.991 87.377,77.989 96.461,77.989 v1(96.725,77.725)
  Bottom Layer w0.254: v1(83.15,76.8) 84.5,76.8 85.691,77.991 87.375,77.991
MPU_INT: R3.1 U2.41 U6.12 | length 22.3
  Top Layer w0.254: U6.12 95.406,85.598 96.9,84.105 96.555,84.105 96.268,83.818 96.268,82.507 v1(96.3,82.475) ; v1(106.825,80.125) 108.948,80.125 108.951,80.128 109.059,80.128 109.129,80.198 109.764,80.198 109.895,80.329 U2.41@109.949,80.275
  Bottom Layer w0.254: v1(96.3,82.475) 100.321,78.454 106.355,78.454 106.801,78.899 106.825,78.875 106.825,79.131 106.832,79.138 106.832,80.118 v1(106.825,80.125)
MPU_SCL: P13.4 R13.1 U2.42 U6.23 | length 35.1
  Top Layer w0.25: R13.1@91.9,91.075 91.911,91.038 92.2,90.075 U6.23 92.2,88.998 92.509,88.689 v1(92.775,88.575) ; R13.1 92.65,91.05 v1(92.675,91.075) ; v1(105.875,79.7) 105.978,79.7 106.239,79.439 107.017,79.439 107.073,79.495 107.086,79.495 107.221,79.63 107.912,79.63 107.975,79.693 108.135,79.693 108.145,79.703 109.895,79.703 U2.42
  Bottom Layer w0.25: v1@92.684,91.075 92.684,98.159 94.093,99.568 P13.4 ; v1(92.775,88.575) 93.3,87.9 101.635,79.565 104.228,79.565 104.423,79.76 105.815,79.76 v1(105.875,79.7)
MPU_SDA: P13.3 R14.1 U2.43 U6.24 | length 43.9
  Top Layer w0.25: v1(90,91) 90.943,91 90.962,90.981 90.962,90.436 U6.24
  Top Layer w0.254: v1(90.45,95.05) 92.543,95.05 93.209,95.716 96.368,98.875 96.368,100.99 P13.3 ; v1(105.255,79.104) 105.255,79.114 105.669,78.7 106.889,78.7 107.252,79.063 107.265,79.063 107.4,79.198 108.223,79.198 108.316,79.291 U2.43@110.183,79.291
  Bottom Layer w0.254: v1(90.45,95.05) 90,94.6 v1(90,91) 90,90.375 101.271,79.104 v1(105.255,79.104)
NetC16_1: C16.1 U2.5 X2.0 | length 10.8
  Top Layer w0.254: C16.1 107.188,69.188 108.57,70.57 X2.0 111.345,70.57 111.345,72.72 113.209,74.584 113.209,75.467 U2.5
NetC17_2: C17.2 U6.20 | length 1.9
  Top Layer w0.254: U6.20 93.7,90.336 C17.2
NetC18_1: C18.1 U7.10 | length 2.3
  Top Layer w0.254: U7.10 100,90.447 C18.1
NetC19_1: C19.1 U7.8 | length 9.6
  Top Layer w0.254: C19.1 99.058,93.55 101.337,93.55 102.3,92.587 102.3,89.1 101.65,88.45 U7.8
NetC19_2: C19.2 U7.12 | length 2.3
  Top Layer w0.254: C19.2 99,90.441 U7.12
NetC20_1: C20.1 U2.6 X2.1 | length 14.7
  Top Layer w0.254: U2.6 113.693,75.451 113.693,74.171 113.475,73.953 113.475,72.3 113.458,72.283 115.171,70.57 X2.1 120.78,70.57 121.793,69.557 C20.1 ; X2.1@121.389,70.57 121.139,70.57 X2.1@121.793,69.916
NetC23_1: C23.1 U6.10 | length 2.3
  Top Layer w0.25: U6.10 93.2,84.5 93.485,84.215 93.785,84.215 C23.1@94.111,83.889
NetD1_P: D1.P L1.2 U5.1 | length 8
  Top Layer w0.8: D1.P 81.53,64.405 L1.2 83.2,65.75 83.95,65 86.45,65
NetL2_N: L2.N R22.0 | length 3.4
  Top Layer w0.35: R22.0@100,76.225 101.95,76.225 102.28,76.555 L2.N
NetL3_N: L3.N R23.0 | length 2.7
  Top Layer w0.5: L3.N 91.825,55.325 R23.0
NetM1_D: M1.D P5.2 | length 5.8
  Top Layer w0.5: M1.D 140.317,118.309 P5.2
NetM2_D: M2.D P6.2 | length 5.5
  Top Layer w0.5: P6.2 64.718,121.507 M2.D
NetM3_D: M3.D P9.2 | length 7.1
  Top Layer w0.8: P9.2 63.391,44.866 M3.D
NetM4_D: M4.D P7.2 | length 6.2
  Top Layer w0.5: M4.D 140.439,44.491 P7.2
NetP3_11: P3.11 R15.0 | length 9.2
  Top Layer w0.254: P3.11@80.685,82.372 P3.11 79.11,83.445 79.11,85.175 79.126,85.191 79.126,85.35 79.745,85.969 80.621,85.969 81.415,85.175 81.415,85.16 R15.0@83.1,83.475
NRST: C21.1 P2.1 P3.15 R5.1 U2.7 | length 68
  Top Layer w0.25: P2.1 76.796,104.879 78.95,102.725 ; P3.15 81.825,89.094 81.825,92.75 78.95,95.625 78.95,102.725 ; C21.1 R5.1 78.95,102.725 ; v1(89.7,80.375) 89.7,80.325 95.175,74.85 107.623,74.85 v1@108.7,75.927 ; v1(114.131,72.554) 114.12,72.564 114.12,73.836 114.178,73.894 114.178,75.436 U2.7
  Bottom Layer w0.25: P3.15 82.573,87.452 89.65,80.375 v1(89.7,80.375) ; v1(108.65,75.9) 109.425,75.9 112.771,72.554 v1(114.131,72.554)
OSC_IN: C9.0 U3.7 X1.0 | length 17
  Top Layer w0.25: C9.0 X1.0@110.9,65.675 ; X1.0 111.475,60.125 116.3,55.3 U3.7@118.616,55.3
OSC_OUT: C10.0 U3.8 X1.1 | length 11
  Top Layer w0.254: C10.0 X1.1@111.15,55.275 ; X1.1 112.95,54.125 U3.8
PWM1: M1.G P12.1 R16.0 U2.10 | length 93.5
  Top Layer w0.25: U2.10 115.733,74.517 117.163,73.088
  Top Layer w0.3: v1(108.425,92.2) 103.35,97.275 103.35,103.914 P12.1 101.913,109.025 123.9,109.025 133.775,118.9 134.476,118.9 R16.0 135.1,118.026 135.1,116.396 M1.G ; 117.163,73.088 117.376,72.874 v1@121.125,72.874
  Bottom Layer w0.3: v1(108.425,92.2) 119.145,81.48 119.145,78.58 120.84,76.885 120.84,76.845 121.091,76.594 121.091,73.266 120.963,73.137 v1(121.125,72.975)
PWM2: M2.G P12.2 R19.1 U2.11 | length 85.7
  Top Layer w0.25: R19.1 65.324,115.225 67.868,115.225 M2.G 75.431,109.45 95,109.45 99.802,104.648 P12.2 102.675,102.049 102.675,96.425 v1@107.65,91.45 ; U2.11 116.233,74.667 117.2,73.7 117.22,73.72 117.411,73.529 117.436,73.554 v1(120.456,73.554)
  Bottom Layer w0.25: v1(107.625,91.45) 108.532,91.45 118.69,81.292 118.69,78.392 118.775,78.307 118.775,78.199 120.456,76.518 v1(120.456,73.554)
PWM3: M3.G P12.3 R17.0 U2.12 | length 116.9
  Top Layer w0.25: R17.0 68.463,47.98 M3.G v1(71.487,48.287) ; P12.3 101.95,100.234 101.95,96.075 v1@107.542,90.483 ; U2.12 117.874,74.35 v1@119.775,74.35
  Bottom Layer w0.25: v1(71.487,48.287) 76.875,53.675 118.5,53.675 119.825,55 v1(119.825,74.4) 119.825,76.541 118.175,78.191 118.175,81.198 108.798,90.575 v1(107.525,90.575)
PWM4: M4.G P12.4 R18.1 U2.13 | length 74
  Top Layer w0.25: P12.4 101.25,98.394 101.25,95.55 104.8,92 ; 104.825,92 v1@107.025,89.8 ; U2.13 118.809,76.766 119.15,76.425 v1(119.05,76.425) 124.2,71.275 125.9,71.275 126.75,70.425 126.75,59.975 135.488,51.237 M4.G 138.48,46.931 R18.1
  Bottom Layer w0.25: v1(107.125,89.775) 108.99,89.775 117.525,81.24 117.525,77.95 v1(119.05,76.425)
RC_CE: P10.3 U2.19 | length 7.1
  Top Layer w0.25: U2.19 120.217,79.766 120.508,79.475 122.375,79.475 122.9,78.95 124.59,78.95 P10.3
RC_CLK: P10.5 P11.4 U2.15 | length 44.4
  Top Layer w0.25: P11.4 108.782,99.568 111.65,96.7 111.65,93.625 116.52,88.755 v1(118.78,88.755) ; U2.15 119.409,77.766 120.7,76.475 P10.5@124.7,76.475
  Bottom Layer w0.25: v1(118.78,88.755) 121.57,88.755 125.825,84.5 125.825,77.645 P10.5
RC_INT: P10.8 U2.18 | length 12.3
  Top Layer w0.25: U2.18 120.109,79.266 120.775,78.6 v1(121.275,78.6)
  Bottom Layer w0.25: v1(121.275,78.6) 121.275,77.025 123.225,75.075 125.537,75.075 126.632,73.98 P10.8
RC_MISO: P10.7 P11.3 U2.16 | length 48
  Top Layer w0.25: P11.3 106.992,102.108 112.102,96.998 112.102,93.782 116.408,89.475 118.951,89.475 120.2,88.226 v1(120.2,88.125) ; U2.16 119.659,78.266 120.7,77.225 123.825,77.225 124.155,77.555 125.395,77.555 125.975,76.975 125.975,75.75 v1@126.475,75.25 ; P10.7 125.205,73.98 126.454,75.229 v1(126.506,75.229)
  Bottom Layer w0.25: v1(120.2,88.125) 120.19,88.115 120.19,85.505 121.85,83.845 121.85,81.25 122.7,80.4 v1(122.7,77.175) ; P10.7@124.495,73.98 P10.7
RC_MOSI: P10.6 P11.2 U2.17 | length 48.3
  Top Layer w0.25: P11.2 105.602,104.648 112.55,97.7 112.55,93.975 116.575,89.95 116.575,89.925 119.725,89.925 120.83,88.82 120.83,87.08 v1(120.8,87.05) ; U2.17 119.784,78.766 120.56,77.99 121.528,77.99 121.563,78.025 125.735,78.025 ; v1(124.025,80.325) 124.255,80.095 125.129,80.095 125.735,79.489 125.735,78.623 125.735,78.025 ; P10.6 125.735,78.025
  Bottom Layer w0.25: v1(120.8,87.05) 121.375,87.05 123.2,85.225 123.2,81.15 v1@123.987,80.363
RC_NSS: P10.4 P11.1 U2.14 | length 60.6
  Top Layer w0.25: P11.1 107.525,104.819 107.525,104 113.05,98.475 113.05,94.275 116.825,90.5 120.375,90.5 v1(121.275,89.6) ; U2.14 119.184,77.266 124.6,71.85 127.675,71.85 128.8,72.975 128.8,77.5 P10.4
  Bottom Layer w0.25: v1(121.275,89.6) v1@121.275,89.75 ; v1@121.305,89.6 128.275,82.63 128.275,81.171 127.24,80.136 P10.4
SD_CLK: P8.5 U2.26 | length 13.8
  Top Layer w0.25: U2.26 116.233,86.058 v1(116.925,86.75) ; v1(118.913,93.95) P8.5
  Bottom Layer w0.25: v1(116.925,86.75) 116.1,87.575 116.1,91.212 v1@118.913,94.025
SD_MISO: P8.7 U2.27 | length 14.1
  Top Layer w0.254: U2.27 115.733,86.508 v1@117.1,87.875 ; v1(121.113,93.825) P8.7
  Bottom Layer w0.254: v1(117.125,87.875) 117.125,89.837 v1(121.113,93.825)
SD_MOSI: P8.3 U2.28 | length 12.6
  Top Layer w0.254: U2.28 v1@115.233,88.5 ; v1(115.65,93.175) 115.75,93.175 116.713,94.138 P8.3
  Bottom Layer w0.254: v1(115.375,88.5) 115.375,92.8 v1@115.75,93.175
SD_NSS: P8.2 U2.25 | length 13.5
  Top Layer w0.254: v1(114.75,93.55) 115.613,94.413 P8.2 ; U2.25@116.758,83.466 116.758,85.258 117.025,85.525 v1(117.025,85.55)
  Bottom Layer w0.254: v1@114.625,93.575 114.625,87.95 v1(117.025,85.55)
STATUS_LED: L2.P U2.45 | length 7.1
  Top Layer w0.254: L2.P 103.645,77.725 107.275,77.725 107.816,78.266 U2.45
pads on no net: P3.17 P3.19 P8. P8.1 P8.8 U1. U2.2 U2.3 U2.4 U2.32 U2.46 U3.9 U3.10 U3.11 U3.12 U3.13 U3.14 U3.15 U4. U4.4 U4.6 U6.3 U6.4 U6.5 U6.16 U6.17 U6.19 U6.21 U6.22 U7.3 U7.5 U7.6 U7.14

## Polygon pours and split planes (outlines as drawn)
GND on Bottom Layer "Bottom Layer-GND" (solid, remove dead copper, pour order 8): 37.225,144.15 38.075,143.3 38.075,18.5 173.45,18.5 174.925,19.975 170.775,24.125 170.775,142.9
GND on Top Layer "Bottom Layer-GND" (solid, remove dead copper, pour order 4): 38.775,139.1 38.625,138.95 38.625,19.675 171.475,19.675 172.625,18.525 165.05,26.1 165.05,143.025

## Keep-outs
Keep-Out Layer:
  lines w0.013: 101.729,50.447 ccw(c100.909,-149.552) 96.078,50.39 ccw(c97.207,3.671) 64.279,36.833 ccw(c78.371,22.641) 59.334,28.771 cw(c51.719,31.223) 46.05,25.577 cw(c51.719,31.223) 49.298,38.848 ccw(c43.246,57.91) 57.381,43.76 ccw(c24.353,76.823) 71.068,75.503 ccw(c-128.852,81.153) 71.148,81.153 ccw(c-128.852,81.153) 71.068,86.804 ccw(c24.353,85.483) 57.381,118.546 ccw(c43.246,104.396) 49.298,123.458 cw(c51.719,131.083) 46.05,136.729 cw(c51.719,131.083) 59.334,133.535 ccw(c78.371,139.665) 64.279,125.473 ccw(c97.207,158.635) 96.078,111.916 ccw(c100.909,311.858) 101.729,111.859 ; 101.979,50.447 cw(c102.799,-149.552) 107.63,50.39 cw(c106.501,3.671) 139.429,36.833 cw(c125.337,22.641) 144.374,28.771 ccw(c151.989,31.223) 157.658,25.577 ccw(c151.989,31.223) 154.41,38.848 cw(c160.462,57.91) 146.327,43.76 cw(c179.355,76.823) 132.64,75.503 cw(c332.56,81.153) 132.56,81.153 cw(c332.56,81.153) 132.64,86.804 cw(c179.355,85.483) 146.327,118.546 cw(c160.462,104.396) 154.41,123.458 ccw(c151.989,131.083) 157.658,136.729 ccw(c151.989,131.083) 144.374,133.535 cw(c125.337,139.665) 139.429,125.473 cw(c106.501,158.635) 107.63,111.916 cw(c102.799,311.858) 101.979,111.859

## Silkscreen, mask and mechanical layers (free items; w line width, h text height)
Top Overlay:
  region: 87,72 89,73 90.275,72.35 91,72 90.275,73.637 88.958,75.917
  lines w0.254: 87,72 89,76 91,72 89,73 87,72
  text "2" at 55.35,125.075 h0.51
  text "1" at 146.4,125.075 h0.51
  text "3V3" at 97.25,108.475 h0.51 r270
  text "NSS" at 106.925,108.05 h0.51 r270
  text "1" at 102.15,107.375 h0.51 r270
  text "GND" at 97.25,105.725 h0.51 r270
  text "MOSI" at 106.925,105.7 h0.51 r270
  text "2" at 102.15,104.925 h0.51 r270
  text "BOOT0" at 85.375,104.55 h0.51 r270
  text "BOOT1" at 92.45,103.5 h0.51 r270
  text "MISO" at 106.925,102.975 h0.51 r270
  text "SDA" at 97.25,102.8 h0.51 r270
  text "3" at 102.15,102.225 h0.51 r270
  text "CLK" at 106.925,100.425 h0.51 r270
  text "SCL" at 97.25,99.875 h0.51 r270
  text "4" at 102.15,99.775 h0.51 r270
  text "PA8" at 106.925,97.75 h0.51 r270
  text "I2C1" at 94.325,96.65 h0.51
  text "MOTOR" at 98.85,96.65 h0.51
  text "SPI1" at 104.4,94.45 h0.51
  text "Sanity-0.1" at 92.125,66.375 h3.08 r30
  text "5V" at 84.325,63.825 h0.51
  text "+" at 75.075,63.4 h0.51
  text "-" at 75.075,60.7 h0.51
  text "3V3" at 93.225,57.45 h0.51
  text "+" at 133,49.575 h1.02 r45
  text "3" at 55.35,36 h0.51
  text "4" at 145.892,36 h0.51
Bottom Overlay:
  text "by Santy 1712" at 131.15,58.15 h1.08
Mechanical 1:
  circle w0.013: c51.689,131.064 r3.8
  circle w0.013: c51.689,31.242 r3.8
  circle w0.013: c152.019,131.064 r3.8
  circle w0.013: c152.019,31.242 r3.8
  region: 49.109,130.762 cw(c49.109,130.766)
  lines w0.013: 101.728,50.447 101.98,50.447 ; 101.728,111.859 101.98,111.859
Mechanical 3:
  circle w0.006: c53.841,132.378 r0.003
  circle w0.006: c49.109,130.766 r0.003

## Text inside footprints (layer, text, board x,y; h text height)
P3: Top Overlay "2" at 78.151,67.132 h0.51 r90; Top Overlay "1" at 80.691,67.132 h0.51 r90; Top Overlay "19" at 80.7,94.325 h0.51 r90; Top Overlay "20" at 78.125,94.3 h0.51 r90
P4: Top Overlay "3V3" at 88.65,107.975 h0.51; Top Overlay "GND" at 88.625,98.875 h0.51
P10: Top Overlay "8" at 126.738,72.26 h0.51 r270; Top Overlay "7" at 124.213,72.26 h0.51 r270; Top Overlay "1" at 122.475,82.85 h0.51 r270; Top Overlay "2" at 127.188,83.875 h0.51 r270